# EAGLE board DIA02-02 (EAGLE 9.7.0)

Size 99.19 x 91.92 mm. Coordinates in mm from the lower left corner, seen from the top.
Outline: 0,0 99.19,0 99.19,91.92 0,91.92 0,0
Copper layers (1*16): Top 0.035mm / dielectric 1.5mm / Bottom 0.035mm
Design rules "default": minimum track width 6mil, minimum drill 0.35mm, track to track 6mil, track to pad 6mil, pad to pad 6mil, via to via 6mil, smd to smd 6mil, copper to edge 40mil, drill to drill 6mil, minimum pad ring 10mil, minimum via ring 8mil, stop-mask expansion 4mil, vias tented up to drill 0mil, thermal gap 10mil

## Footprints (pad centres in the part's own frame; a part is rotated, then mirrored left to right if it is on the bottom)
LEDRD254W60D565H860B = drill 0.981 pad 1.581: 1 -1.27,0; 2 1.27,0
LEDRD254W60D565H860B_Y = drill 0.981 pad 1.581: 1 -1.27,0; 2 1.27,0
LEDRD254W60D565H860B_G = drill 0.981 pad 1.581: 1 -1.27,0; 2 1.27,0
7SEG-13 = drill 0.813 long: 1 -5.08,-7.62; 2 -2.54,-7.62; 3 0,-7.62; 4 2.54,-7.62; 5 5.08,-7.62; 6 5.08,7.62; 7 2.54,7.62; 8 0,7.62; 9 -2.54,7.62; 10 -5.08,7.62
RESAD1016W63L850D250B = drill 0.83 pad 1.43: 1 -5.08,0; 2 5.08,0
ARDUINO-UNO-R3-SHIELD = drill 1.016 pad 1.88: 3.3V 24.13,-2.54; 5V 24.13,0; A0 24.13,12.7; A1 24.13,15.24; A2 24.13,17.78; A3 24.13,20.32; A4 24.13,22.86; A5 24.13,25.4; AREF -24.13,-13.97; D2 -24.13,20.32; D3 -24.13,17.78; D4 -24.13,15.24; D5 -24.13,12.7; D6 -24.13,10.16; D7 -24.13,7.62; D8 -24.13,3.81; D9 -24.13,1.27; D10 -24.13,-1.27; D11 -24.13,-3.81; D12 -24.13,-6.35; D13 -24.13,-8.89; GND@0 24.13,2.54; GND@1 24.13,5.08; GND@2 -24.13,-11.43; IOREF 24.13,-7.62; NC 24.13,-10.16; RES 24.13,-5.08; RX -24.13,25.4; SCL -24.13,-19.05; SDA -24.13,-16.51; TX -24.13,22.86; VIN 24.13,7.62

## Placement (x,y rotation side)
D1  RED  [LEDRD254W60D565H860B]  89.75,16.22 90 top
D2  YELLOW  [LEDRD254W60D565H860B_Y]  89.75,11.14 90 top
D3  GREEN  [LEDRD254W60D565H860B_G]  89.75,6.06 90 top
DIGIT7  7SEG-CA  [7SEG-13]  89.92,52.47 0 top
RGREEN  200  [RESAD1016W63L850D250B]  82.13,7.33 0 top
RRED  200  [RESAD1016W63L850D250B]  82.13,17.49 0 top
RRR  220  [RESAD1016W63L850D250B]  89.92,70.25 90 top
RRR2  220  [RESAD1016W63L850D250B]  89.92,34.69 90 top
RYELLOW  200  [RESAD1016W63L850D250B]  82.13,12.41 0 top
UUNO  ARDUINO-UNO-R3-SHIELD  [ARDUINO-UNO-R3-SHIELD]  29.84,44.03 180 top

## Library data of the parts
D1 = Tinkercad; CATEGORY: Opto-Electronic; SUB-CATEGORY: LED; VALUE: LED_RED
D2 = Tinkercad; CATEGORY: Opto-Electronic; SUB-CATEGORY: LED; VALUE: LED_YELLOW
D3 = Tinkercad; CATEGORY: Opto-Electronic; SUB-CATEGORY: LED; VALUE: LED_GREEN
DIGIT7 = Tinkercad; CATEGORY: Opto-Electronic; SUB-CATEGORY: Display; TYPE: 7-Segment
RGREEN RRED RRR RRR2 RYELLOW UUNO = Tinkercad

## Nets
D1_C: D1.2 RRED.2
D2_C: D2.2 RYELLOW.2
D3_C: D3.2 RGREEN.2
DIGIT7_CA1: DIGIT7.3 RRR2.2
DIGIT7_CA2: DIGIT7.8 RRR.1
UUNO_5V: RRR2.1 RRR.2 UUNO.5V
UUNO_D2: D3.1 UUNO.D2
UUNO_D3: D2.1 UUNO.D3
UUNO_D4: D1.1 UUNO.D4
UUNO_D5: DIGIT7.4 UUNO.D5
UUNO_D6: DIGIT7.2 UUNO.D6
UUNO_D7: DIGIT7.1 UUNO.D7
UUNO_D8: DIGIT7.6 UUNO.D8
UUNO_D9: DIGIT7.7 UUNO.D9
UUNO_D10: DIGIT7.9 UUNO.D10
UUNO_D11: DIGIT7.10 UUNO.D11
UUNO_GND: RGREEN.1 RRED.1 RYELLOW.1 UUNO.GND@0 UUNO.GND@1 UUNO.GND@2

## Tracks (layer width: path | path; a pad name or v marks a point on that pad's centre or on a via)
D1_C  (1 unrouted)
D2_C  (1 unrouted)
D3_C  (1 unrouted)
DIGIT7_CA1  (1 unrouted)
DIGIT7_CA2  (1 unrouted)
UUNO_5V  (2 unrouted)
UUNO_D2  (1 unrouted)
UUNO_D3  (1 unrouted)
UUNO_D4  (1 unrouted)
UUNO_D5  (1 unrouted)
UUNO_D6  (1 unrouted)
UUNO_D7  (1 unrouted)
UUNO_D8  (1 unrouted)
UUNO_D9  (1 unrouted)
UUNO_D10  (1 unrouted)
UUNO_D11  (1 unrouted)
UUNO_GND  (5 unrouted)